# Altium PCB PCB_X_32.PcbDoc
Units mm, origin at the board's own origin, x right, y up, seen from the top; angles counter-clockwise.
Board outline 35.31 x 27.43 mm, 2 copper layers (Top Layer, Bottom Layer); 28 components, 26 nets, 143 pads, 41 vias.
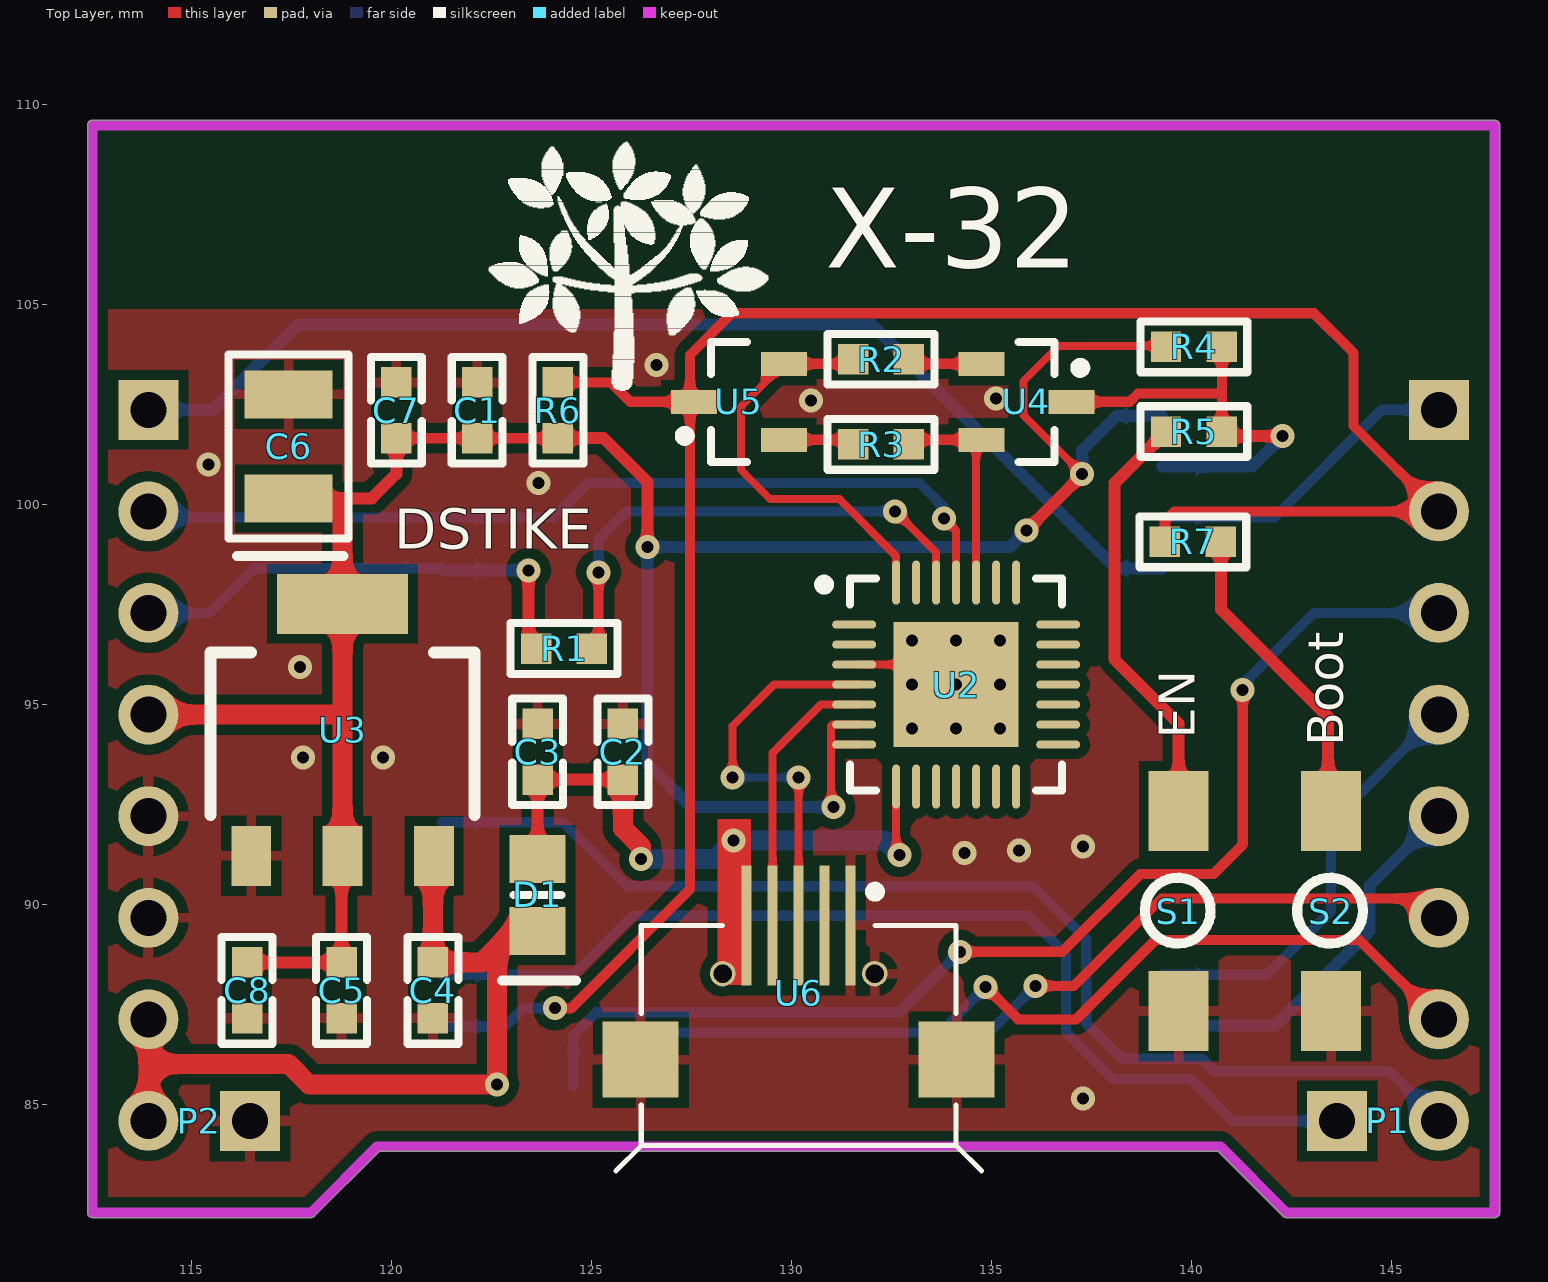
[diagram p0: Top Layer view]
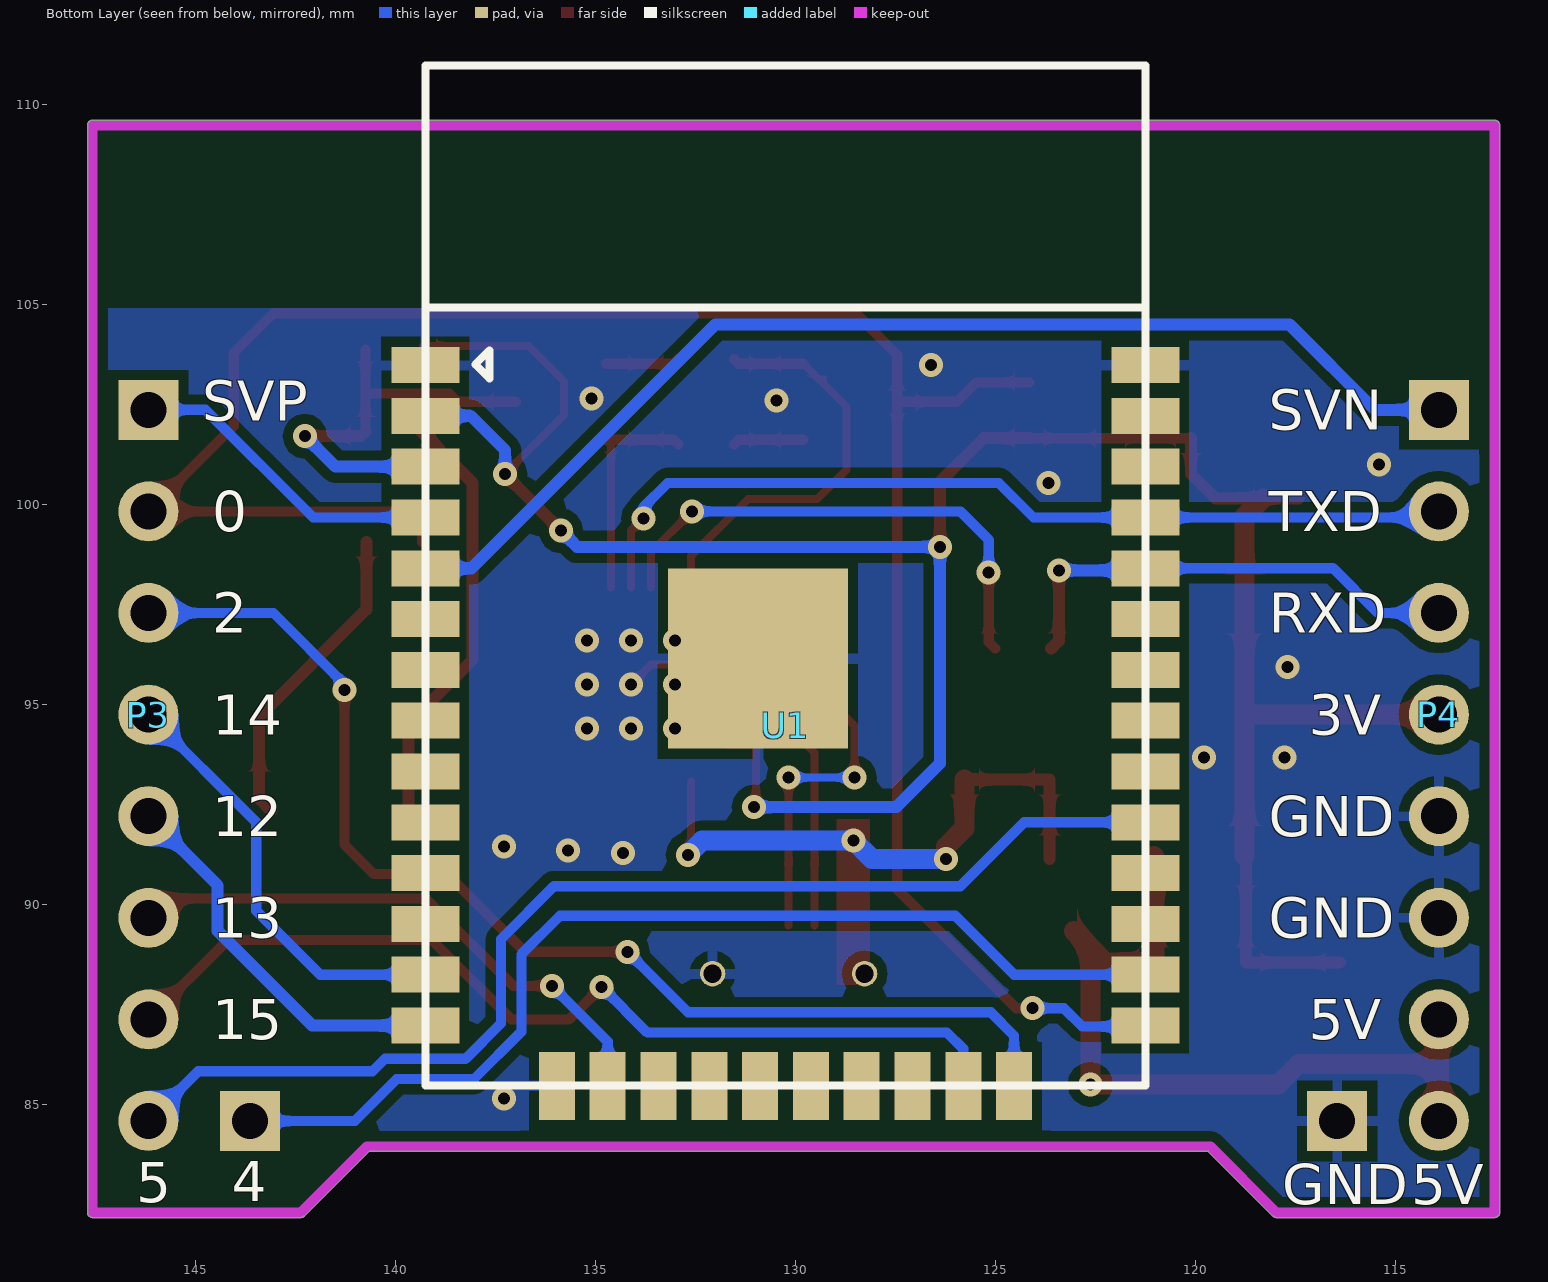
[diagram p1: Bottom Layer view, seen from below]

## Layer stack, top to bottom
Top Solder: solder mask 0.0102, Solder Resist, Dk 3.5
Top Layer: signal copper 0.0356
Dielectric 1: dielectric 0.32, FR-4, Dk 4.8
Bottom Layer: signal copper 0.0356
Bottom Solder: solder mask 0.0102, Solder Resist, Dk 3.5

## Board outline
112.395,82.296 ccw(c112.522,82.296) 112.522,82.169 117.983,82.169 ccw(c117.983,82.296) 118.074,82.206 118.073,82.206 119.687,83.82 140.663,83.82 142.277,82.206 142.276,82.206 ccw(c142.367,82.296) 142.367,82.169 147.574,82.169 ccw(c147.574,82.296) 147.701,82.296 147.701,109.474 ccw(c147.574,109.474) 147.574,109.601 112.522,109.601 ccw(c112.522,109.474) 112.395,109.474

## Design rules (kind name [scope] priority, off if disabled: settings)
Clearance [All] p1: gap=0.254
PolygonConnect PolygonConnect_via [IsVia] p1: connectstyle=Direct reliefconductorwidth=0.254 reliefentries=4 polygonreliefangle="90 Angle" airgapwidth=0.254
PolygonConnect [All] p2: connectstyle=Relief reliefconductorwidth=0.254 reliefentries=4 polygonreliefangle="90 Angle" airgapwidth=0.254
RoomDefinition Sheet_x_32 [InComponentClass('Sheet_x_32')] p1: confinementstyle=ConfineIn formatcopy=TRUE lockcomponents=FALSE outline 0,0 50.8,0 50.8,25.4 0,25.4
RoutingVias [All] p1: holewidth=0.711 width=1.27 viastyle="Through Hole" minholewidth=0.711 minwidth=1.27 maxholewidth=0.711 maxwidth=1.27
SolderMaskExpansion [All] p1: expansion=0.102
Width [All] p1: maxlimit=1 minlimit=0.2 preferedwidth=0.254
30 further rules are at their usual default settings.

## Components (designator, comment, footprint, x,y, rotation, side; value= is the part's Value field where it differs from the comment)
C1 "10uF" C0603 122.314,101.625 r90 top
C2 "10uF" C0603 125.959,93.091 r90 top
C3 "100nF" C0603 123.825,93.091 r90 top
C4 "10uF" C0603 120.853,88.57 r270 top
C5 "10uF" C0603 118.567,88.57 r270 top
C6 "100uF" C3528 117.424,101.448 r90 top
C7 "100nF" C0603 120.294,101.625 r90 top
C8 "22uF" C0603 116.205,88.57 r270 top
D1 "1N5819" 1n4148 123.625,91.05 r270 top
P1 "Header 2" HDR1X2 143.637,84.582 r0 top
P2 "Header 2" HDR1X2 116.459,84.582 r180 top
P3 "Header 7" HDR1X7 146.177,102.362 r270 bottom
P4 "Header 7" HDR1X7 113.919,102.362 r270 bottom
R1 "470" R0603 124.308,96.393 r180 top
R2 "12K" R0603 132.232,103.625 r180 top
R3 "12K" R0603 132.232,101.498 r0 top
R4 "12K" R0603 140.056,103.937 r180 top
R5 "470" R0603 140.056,101.816 r0 top
R6 "12K" R0603 124.155,102.349 r270 top
R7 "470" R0603 140.03,99.06 r180 top
S1 "贴片按钮" switch 139.624,89.891 r0 top
S2 "贴片按钮" switch 143.434,89.891 r0 top
U1 "ESP32s" ESP32s 130.816,96.196 r180 bottom
U2 "CP2102" CP2102 134.111,95.467 r0 top
U3 "AMS1117" AMS1117 118.745,94.793 r0 top
U4 "S8050" s8050 135.788,102.638 r0 top
U5 "S8050" s8050 128.753,102.486 r180 top
U6 "MicroUSB-5P" microusb 133.96,86.226 r270 top

## Footprints (in the part's own frame and the unit in brackets; to place one, negate y for a bottom-side part, rotate by r counter-clockwise, add the part's x,y. Pads: shape width x height; smd on the part's side, far side on the other; paste and mask are expansions set on the pad)
1n4148 [mm]
  rect 1.2x1.4 smd: 1(-0.082,0.022) 2(1.718,0.022)
  silkscreen extent 0.82,-0.87 2.96,0.98, body extent -0.26,-0.68 1.89,0.72, height 0.7
AMS1117 [mil]
  rect 39x59 smd: 1(-89,-141) 3(91,-141)
  rect 38.98x59.06 smd: 2(1,-141)
  rect 129.13x59 smd: 2(1,107.03)
  silkscreen extent -129,-101 131,59
C0603 [mil]
  rect 30x30 smd: 1(1,7) 2(56,7)
  silkscreen extent -24,-18 81,32
C3528 [mm]
  rect 1.2x2.2 smd: 1(-1.3,0) 2(1.3,0)
  silkscreen extent -2.74,-1.5 2.3,1.5
CP2102 [mm]
  oval 1.1x0.2 smd: 1(-2.55,1.525) 2(-2.55,1.025) 3(-2.55,0.525) 4(-2.55,0.025) 5(-2.55,-0.475) 6(-2.55,-0.975) 7(-2.55,-1.475) 15(2.55,-1.475) 16(2.55,-0.975) 17(2.55,-0.475) 18(2.55,0.025) 19(2.55,0.525) 20(2.55,1.025) 21(2.55,1.525)
  oval 0.2x1.1 smd: 8(-1.5,-2.525) 9(-1,-2.525) 10(-0.5,-2.525) 11(0,-2.525) 12(0.5,-2.525) 13(1,-2.525) 14(1.5,-2.525) 22(1.5,2.575) 23(1,2.575) 24(0.5,2.575) 25(0,2.575) 26(-0.5,2.575) 27(-1,2.575) 28(-1.5,2.575)
  rect 3.13x3.13 smd: 29(0,0.025)
  silkscreen extent -3.42,-2.62 2.65,2.68, body extent -2.5,-2.47 2.5,2.53, height 1
ESP32s [mm]
  rect 1.7x0.9 smd: 1(-8.441,7.283) 2(-8.441,6.013) 3(-8.441,4.743) 4(-8.441,3.473) 5(-8.441,2.203) 6(-8.441,0.933) 7(-8.441,-0.337) 8(-8.441,-1.607) 9(-8.441,-2.877) 10(-8.441,-4.147) 11(-8.441,-5.417) 12(-8.441,-6.687) 13(-8.441,-7.957) 14(-8.441,-9.227) 25(9.559,-9.227) 26(9.559,-7.957) 27(9.559,-6.687) 28(9.559,-5.417) 29(9.559,-4.147) 30(9.559,-2.877) 31(9.559,-1.607) 32(9.559,-0.337) 33(9.559,0.933) 34(9.559,2.203) 35(9.559,3.473) 36(9.559,4.743) 37(9.559,6.013) 38(9.559,7.283)
  rect 0.9x1.7 smd: 15(-5.151,-10.737) 16(-3.881,-10.737) 17(-2.611,-10.737) 18(-1.341,-10.737) 19(-0.071,-10.737) 20(1.199,-10.737) 21(2.469,-10.737) 22(3.739,-10.737) 23(5.009,-10.737) 24(6.279,-10.737)
  rect 4.5x4.5 smd: 39(-0.121,-0.057)
  silkscreen extent -8.44,-10.73 9.56,14.77
HDR1X2 [mm] "Connector; Header; 2 Position"
  rect 1.5x1.5 hole 0.9: 1(0,0)
  round 1.5 hole 0.9: 2(2.54,0)
HDR1X7 [mm] "Connector; Header; 7 Position"
  rect 1.5x1.5 hole 0.9: 1(0,0)
  round 1.5 hole 0.9: 2(2.54,0) 3(5.08,0) 4(7.62,0) 5(10.16,0) 6(12.7,0) 7(15.24,0)
microusb [mm]
  rect 3x0.25 smd: 1(-3.247,-5.085) 2(-3.247,-4.435) 3(-3.247,-3.785) 4(-3.247,-3.135) 5(-3.247,-2.485)
  round 0.635 hole 0.457 unplated: 1(-2.039,-5.685) 5(-2.039,-1.885)
  rect 1.9x1.9 smd: 6(0.111,0.165) 7(0.111,-7.735)
  silkscreen extent -4.21,-8.35 2.89,0.78
R0603 [mil]
  rect 30x30 smd: 1(-27.5,0) 2(27.5,0)
  silkscreen extent -52,-25 52,25
s8050 [mm]
  rect 1.15x0.6 smd: 1(-1.049,0.874) 2(-1.049,-1.026) 3(1.201,-0.076)
  silkscreen extent -0.12,-1.58 1.55,1.42, body extent -0.62,-1.58 0.78,1.42, height 1.1
switch [mm]
  rect 1.5x2 smd: 1(0.051,2.438) 2(0.051,-2.562)
  silkscreen extent -0.8,-0.87 0.85,0.77

## Part data
C1 C2 C3 C4 C5 C7 C8: library part C0603, "贴片电容"
C6: library part "Cap Semi", "Capacitor 3.5x2.8mm"
D1: library part 1N4148, "二极管"
P1 P2: "Header, 2-Pin"
P3 P4: "Header, 7-Pin"
R1 R2 R3 R4 R5 R6 R7: library part R0603, "贴片电阻"
S1 S2: library part Switch, "3*4*2mm开关"
U1: library part ESP32, "WIFI&Bluetooth"
U2: "USB转串口芯片"
U3: "3.3V稳压芯片"
U4 U5: "三极管"
U6: library part MicroUSB_5S, "Micro USB插脚"

## Free pads (board coordinates)
  round 3 on Keep-Out: ""(115.062,106.934) ""(145.034,106.934)

## Via types
v1: diameter 0.6, hole 0.3, Top Layer to Bottom Layer, tented both sides, 31 vias
v2: diameter 0.6, hole 0.3, Top Layer to Bottom Layer, 10 vias

## Nets (pads, with @x,y where several pads share a name; then routed paths per layer and width w, separated by ;. In a path a pad name is that pad's centre, name@x,y a point inside that pad or via, vN(x,y) a via of type N, cw(c..) or ccw(c..) an arc to the next point about the centre after c; other vN are vias at no path point)
#EN: R4.1 R5.2 U1.3 U4.3 | length 10.8
  Top Layer w0.254: U4.3 138.452,102.562 138.659,102.768 140.741,102.768 ; R5.2 R4.1@140.754,103.873
  Top Layer w0.3: R5.2 140.868,101.702 v1(142.265,101.702)
  Bottom Layer w0.3: U1.3 141.503,100.939 v1(142.265,101.702)
D_N: U2.5 U6.2 | length 7
  Top Layer w0.2: U6.2 129.521,89.477 129.521,93.783 130.73,94.992 U2.5 U2.5@131.686,94.992
D_P: U2.4 U6.3 | length 10.2
  Top Layer w0.2: v1(128.524,93.167) 128.524,94.463 129.553,95.492 U2.4 U2.4@131.686,95.492 ; U6.3 v1(130.175,93.167)
  Bottom Layer w0.2: v1(128.524,93.167) v1(130.175,93.167)
DTR: R2.2 U2.28 U5.2 | length 10.4
  Top Layer w0.2: U5.2 128.727,102.438 128.727,100.863 129.464,100.127 131.191,100.127 132.611,98.707 U2.28 U2.28@132.611,97.917
  Top Layer w0.254: U5.2 131.42,103.512 R2.2
GND: C1.2 C2.2 C3.2 C4.2 C5.2 C6.2 C7.2 C8.2 P2.1 P4.5 P4.6 S1.2 S2.2 U1.1 U1.15 U1.38 U1.39 U2.3 U2.29 U3.1 U6.5 U6.6 U6.7 | length 2.6
  Top Layer w0.2: U2.3@131.686,95.992 133.611,95.992 v2(134.111,95.492)
  other v1: 137.287,85.141 134.315,91.288 135.687,91.338 137.287,91.44 117.78,93.675 119.786,93.675 117.704,95.936 123.673,100.533 115.418,100.99 130.48,102.591 126.619,103.48
  other v2: 133.011,94.392 134.111,94.392 135.211,94.392 133.011,95.492 135.211,95.492 133.011,96.592 134.111,96.592 135.211,96.592 135.103,102.641
GPIO0: P3.2 R6.1 R7.2 U1.25 U5.3 | length 54.2
  Top Layer w0.254: v1(124.079,87.401) 124.485,87.401 127.457,90.373 U5.3@127.457,102.562 ; R6.1 125.476,103.048 125.962,102.562 U5.3@127.457,102.562 ; R7.2 139.332,99.581 139.573,99.822 P3.2 144.043,101.956 144.043,103.784 143.053,104.775 128.499,104.775 127.457,103.734 U5.3@127.457,102.562
  Bottom Layer w0.254: U1.25 121.282,86.944 122.834,86.944 123.292,87.401 v1(124.079,87.401)
GPIO2: P3.3 U1.24 | length 29.6
  Top Layer w0.254: v1(134.201,88.811) 136.766,88.811 138.709,90.754 140.538,90.754 141.275,91.491 v1(141.275,95.352)
  Bottom Layer w0.254: U1.24 124.537,86.716 125.12,87.3 132.69,87.3 v1(134.201,88.811) ; v1(141.275,95.352) 141.275,95.504 143.053,97.282 P3.3
GPIO4: P1.1 U1.26 | length 26.2
  Bottom Layer w0.254: U1.26 124.536,88.239 126.009,89.713 135.89,89.713 136.855,88.748 136.855,86.814 138.039,85.63 139.973,85.63 141.021,84.582 P1.1
GPIO5: P1.2 U1.29 | length 29.2
  Bottom Layer w0.254: U1.29 124.283,92.049 125.882,90.449 136.042,90.449 137.363,89.129 137.363,87.024 138.249,86.138 140.265,86.138 140.576,85.827 144.932,85.827 P1.2
GPIO12: P3.5 U1.14 | length 9.8
  Bottom Layer w0.3: U1.14 142.087,86.969 144.45,89.332 144.45,90.475 P3.5
GPIO13: P3.6 U1.16 | length 14.3
  Top Layer w0.254: v1(136.093,87.96) 137.058,87.96 139.243,90.145 145.694,90.145 P3.6
  Bottom Layer w0.254: U1.16 134.697,86.564 v1(136.093,87.96)
GPIO14: P3.4 U1.13 | length 10.9
  Bottom Layer w0.254: U1.13 141.884,88.239 143.485,89.84 143.485,92.05 P3.4
GPIO15: P3.7 U1.23 | length 23.9
  Top Layer w0.254: v1(134.849,87.935) 135.661,87.122 137.109,87.122 139.09,89.103 144.196,89.103 P3.7
  Bottom Layer w0.254: U1.23 125.807,86.386 126.213,86.792 133.706,86.792 v1(134.849,87.935)
NetR1_1: R1.1 U2.26 | length 12.8
  Top Layer w0.2: v1(132.588,99.822) 133.611,98.799 U2.26 U2.26@133.611,97.917
  Top Layer w0.254: R1.1 125.171,96.558 v1(125.171,98.298)
  Bottom Layer w0.254: v1(125.171,98.298) 125.171,99.111 125.882,99.822 v1(132.588,99.822)
NetR2_1: R2.1 U4.1 | length 1.9
  Top Layer w0.254: R2.1 133.044,103.512 U4.1
NetR3_1: R3.1 U5.1 | length 1.8
  Top Layer w0.254: U5.1 131.42,101.612 R3.1
NetR5_1: R5.1 S1.1 | length 10.7
  Top Layer w0.3: R5.1 138.074,100.533 138.074,96.114 139.675,94.513 S1.1
NetR7_1: R7.1 S2.1 | length 8
  Top Layer w0.3: R7.1 140.729,97.371 143.408,94.691 143.408,92.634 S2.1@143.104,92.329
RTS: R3.2 U2.24 U4.2 | length 5.6
  Top Layer w0.2: U2.24@134.611,97.917 U2.24 134.611,101.483 U4.2
  Top Layer w0.254: R3.2 133.044,101.612 U4.2
RXD0: P4.3 R1.2 U1.34 | length 12
  Top Layer w0.3: v1(123.419,98.349) 123.419,96.584 R1.2
  Bottom Layer w0.254: P4.3 115.443,97.282 116.56,98.399 U1.34
  Bottom Layer w0.3: U1.34 121.307,98.349 v1(123.419,98.349)
SENSOR_VN: P4.1 U1.5 | length 28.7
  Bottom Layer w0.3: P4.1 115.519,102.362 117.653,104.496 132.004,104.496 138.1,98.399 U1.5
SENSOR_VP: P3.1 U1.4 | length 8
  Bottom Layer w0.254: U1.4 142.062,99.669 144.755,102.362 P3.1
TXD0: P4.2 U1.35 U2.25 | length 22.7
  Top Layer w0.2: v1(133.807,99.644) 134.111,99.341 U2.25 U2.25@134.111,97.917
  Bottom Layer w0.254: P4.2 114.072,99.669 U1.35 124.053,99.669 124.917,100.533 133.195,100.533 133.807,99.921 v1(133.807,99.644)
VCC_3V3: C1.1 C5.1 C6.1 C7.1 C8.1 P4.4 R4.2 R6.2 U1.2 U2.6 U2.7 U3.2 | length 66.6
  Top Layer w0.2: v1(131.039,92.431) 130.988,92.481 130.988,94.031 ; U2.7@131.686,93.992 U2.7 131.027,93.992 130.988,94.031 ; U2.6@131.686,94.492 U2.6 131.017,94.492 130.988,94.463 130.988,94.031 ; v1(137.262,100.762) 135.788,102.235 135.788,103.073 136.677,103.962 R4.2@139.319,103.962
  Top Layer w0.254: C7.1 R6.2
  Top Layer w0.3: C8.1 C5.1 118.745,91.186 U3.2@118.77,91.211 ; C6.1 118.318,100.148 119.502,100.148 120.117,100.762 C7.1 ; R6.2 125.298,101.651 126.39,100.559 v1(126.39,98.933) ; v1(135.865,99.339) 137.262,100.736 v1(137.262,100.762)
  Top Layer w0.5: P4.4 118.745,94.742 ; C6.1@118.318,100.148 118.77,99.695 118.77,97.511 U3.2@118.77,91.211
  Bottom Layer w0.3: v1(131.039,92.431) 127.483,92.431 126.39,93.523 v1(126.39,98.933) 135.458,98.933 v1(135.865,99.339) ; v1(137.262,100.762) 137.262,101.346 138.125,102.209 U1.2
VCC_5V: C4.1 D1.2 P2.2 P4.7 U3.3 | length 19.9
  Top Layer w0.5: P2.2 113.919,86.004 ; P4.7 113.919,86.004 ; U3.3 121.031,91.186 C4.1 122.25,88.544 122.631,88.925 ; D1.2@123.038,89.332 122.631,88.925 ; 113.919,86.004 117.424,86.004 117.932,85.496 v1(122.631,85.496) 122.631,88.925
VCC_USB: C2.1 C3.1 D1.1 U2.8 U6.1 | length 14.9
  Top Layer w0.2: v1@132.611,91.237 U2.8 U2.8@132.611,93.067
  Top Layer w0.3: D1.1 C3.1 C2.1
  Top Layer w0.5: C2.1 125.781,91.897 126.238,91.44 v1(126.238,91.135)
  Bottom Layer w0.5: v1(126.238,91.135) 128.092,91.135 v1(128.549,91.592) 132.334,91.592 v1(132.69,91.237)
pads on no net: U1.6 U1.7 U1.8 U1.9 U1.10 U1.11 U1.12 U1.17 U1.18 U1.19 U1.20 U1.21 U1.22 U1.27 U1.28 U1.30 U1.31 U1.32 U1.33 U1.36 U1.37 U2.1 U2.2 U2.9 U2.10 U2.11 U2.12 U2.13 U2.14 U2.15 U2.16 U2.17 U2.18 U2.19 U2.20 U2.21 U2.22 U2.23 U2.27 U6.4

## Polygon pours and split planes (outlines as drawn)
GND on Top Layer "Top Layer-No Net" (solid, remove dead copper, pour order 28): 111.887,110.693 112.141,110.439 149.098,110.439 149.098,80.721 148.717,80.34 148.438,80.62 110.998,80.62
GND on Bottom Layer "Top Layer-No Net" (solid, remove dead copper, pour order 30): 111.557,109.88 148.285,109.88 148.336,109.83 148.336,81.559 111.862,81.559

## Keep-outs
Keep-Out Layer:
  lines w0.254: 112.522,82.296 112.522,109.474 147.574,109.474 147.574,82.296 142.367,82.296 140.716,83.947 119.634,83.947 117.983,82.296 112.522,82.296

## Other copper
Top Layer:
  rectangle net VCC_USB: 128.143,87.986 128.981,92.126
  pour cut-out: 112.522,109.449 147.574,109.449 147.574,104.877 147.472,104.877 112.522,104.877
Bottom Layer:
  pour cut-out: 112.522,109.474 147.574,109.474 147.574,104.902 147.472,104.902 112.522,104.902

## Silkscreen, mask and mechanical layers (free items; w line width, h text height)
Top Overlay:
  drawing of 1036 lines, arcs and shapes, not listed
  text "X-32" at 130.835,105.918 h2
  text "DSTIKE" at 120.066,98.882 h1
  text "EN" at 140.081,94.132 h0.9 r90
  text "Boot" at 143.789,93.955 h0.9 r90
Bottom Overlay:
  text "SVP" at 144.831,102.083 h1
  text "SVN" at 118.173,101.862 h1
  text "TXD" at 118.173,99.322 h1
  text "0" at 144.577,99.322 h1
  text "RXD" at 118.173,96.782 h1
  text "2" at 144.577,96.782 h1
  text "3V" at 117.173,94.242 h1
  text "14" at 144.577,94.242 h1
  text "GND" at 118.173,91.702 h1
  text "12" at 144.577,91.702 h1
  text "GND" at 118.173,89.162 h1
  text "13" at 144.577,89.162 h1
  text "5V" at 117.173,86.622 h1
  text "15" at 144.577,86.622 h1
  text "4" at 144.094,82.575 h1
  text "5" at 146.482,82.55 h1
  text "5V" at 114.605,82.499 h1
  text "GND" at 117.831,82.499 h1